# Altium PCB ALTERA256.PcbDoc (part 3 of 4)
Units mil, origin at the board's own origin, x right, y up, seen from the top; angles counter-clockwise.
Board outline 3078.86 x 1897.76 mil, 4 copper layers (TOP, L2_G, L3_P, BOTTOM), stack 34.7 mil thick; 112 components, 168 nets, 693 pads, 318 vias.
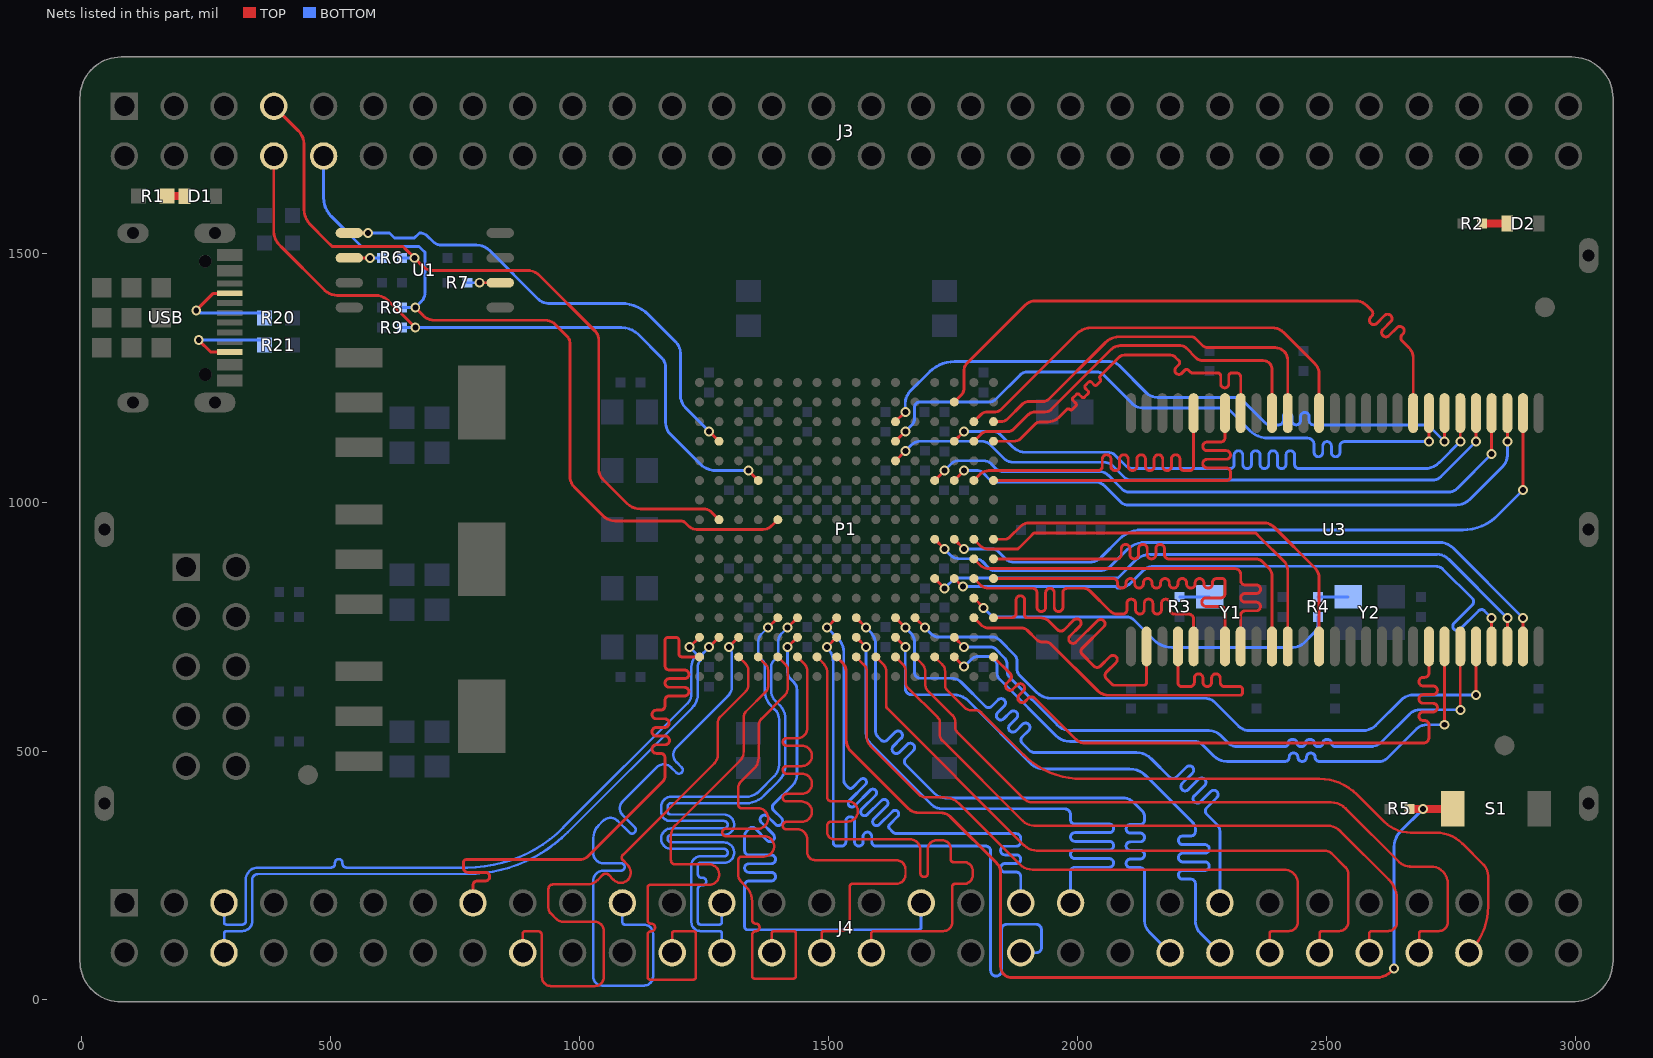
[diagram p5: the nets of this part, all layers, seen from the top]

## Via types
v1: diameter 20, hole 12, TOP to BOTTOM, 314 vias
v2: diameter 20, hole 12, TOP to BOTTOM, tented both sides, 4 vias

## Nets (pads, with @x,y where several pads share a name; then routed paths per layer and width w, separated by ;. In a path a pad name is that pad's centre, name@x,y a point inside that pad or via, vN(x,y) a via of type N, cw(c..) or ccw(c..) an arc to the next point about the centre after c; other vN are vias at no path point) (continued)
N5_B4P_B3: J4.26 P1.N5 | length 1376.5
  TOP w5.78: v1(1378.26,748.02) P1.N5@1397.94,767.7
  BOTTOM w5: J4.26@1285.73,94.88 1285.73,133.38 ccw(c1280.73,133.38) 1280.73,138.38 1242.49,138.38 cw(c1242.49,156.38) 1224.49,156.38 1224.49,270.5 cw(c1242.49,270.5) 1242.49,288.5 1289.8,288.5 ccw(c1289.8,296) 1289.8,303.5 1183.99,303.5 cw(c1183.99,324) 1183.99,344.5 1289.8,344.5 ccw(c1289.8,352) 1289.8,359.5 1181.99,359.5 cw(c1181.99,378) 1163.49,378 1163.49,388 cw(c1183.49,388) 1183.49,408 1333.76,408 ccw(c1333.77,445.53) 1360.3,418.99 1390.8,449.49 ccw(c1367.86,472.43) 1400.3,472.43 1400.3,563.49 ccw(c1372.46,563.48) 1392.56,582.74 1383.74,591.56 cw(c1412.59,620.4) 1371.8,620.41 1371.8,670.84 ccw(c1358.14,670.84) 1367.8,680.5 1361.8,686.5 cw(c1370.25,694.95) 1358.3,694.95 1358.3,719 cw(c1380.17,718.99) 1364.71,734.46 v1(1378.26,748.02)
N6_B4N_B3: J4.25 P1.N6 | length 1376.5
  TOP w5.78: v1(1417.63,748.02) P1.N6@1437.31,767.7
  BOTTOM w5: J4.25@1285.73,194.88 1285.73,156.38 cw(c1280.73,156.38) 1280.73,151.38 1242.49,151.38 cw(c1242.49,156.38) 1237.49,156.38 1237.49,222.9 cw(c1244.99,222.9) 1244.99,230.4 1246.8,230.4 ccw(c1246.8,237.9) 1246.8,245.4 1244.99,245.4 cw(c1244.99,252.9) 1237.49,252.9 1237.49,270.5 cw(c1242.49,270.5) 1242.49,275.5 1289.8,275.5 ccw(c1289.8,296) 1289.8,316.5 1183.99,316.5 cw(c1183.99,324) 1183.99,331.5 1289.8,331.5 ccw(c1289.8,352) 1289.8,372.5 1181.99,372.5 cw(c1181.99,378) 1176.49,378 1176.49,388 cw(c1183.49,388) 1183.49,395 1333.77,395 ccw(c1333.77,445.53) 1369.5,409.8 1399.99,440.29 ccw(c1367.86,472.42) 1413.3,472.44 1413.3,563.49 ccw(c1372.45,563.49) 1401.85,591.85 1392.94,600.76 cw(c1412.59,620.41) 1384.8,620.41 1384.8,670.84 cw(c1398.46,670.84) 1388.8,680.5 1394.8,686.5 ccw(c1386.35,694.95) 1398.3,694.95 1398.3,719 cw(c1421.69,719) 1405.15,735.54 v1(1417.63,748.02)
N8_IO_B3: J4.37 P1.N8 | length 1372.6
  TOP w5.78: v1(1496.37,748.02) P1.N8@1516.05,767.7
  BOTTOM w5.78: v1(1496.37,748.02) 1519.34,725.05 cw(c1492.88,698.59) 1530.3,698.59 1530.3,441.66 ccw(c1543.96,441.66) 1534.3,432 1539.99,426.31 ccw(c1543.8,430.12) 1547.61,426.31 1563.91,442.6 cw(c1568.91,437.6) 1573.91,432.6 1541.42,400.14 ccw(c1546.67,394.88) 1551.92,389.63 1583.6,421.3 cw(c1588.85,416.05) 1594.1,410.8 1566.56,383.27 ccw(c1572.06,377.77) 1577.56,372.27 1605.81,400.51 cw(c1611.31,395.01) 1616.81,389.51 1590.62,363.35 ccw(c1596.12,357.84) 1601.62,352.33 1628.05,378.75 cw(c1633.3,373.5) 1638.55,368.25 1622.12,351.82 ccw(c1625.94,348) 1622.12,344.18 1628.8,337.5 ccw(c1637.25,345.95) 1637.25,334 1876.51,334 cw(c1876.51,324.78) 1885.73,324.78 1885.73,317.44 cw(c1877.06,317.44) 1877.06,308.77 1853.97,308.77 ccw(c1853.97,300.1) 1853.97,291.43 1877.06,291.43 cw(c1877.06,282.76) 1877.06,274.09 1853.97,274.09 ccw(c1853.97,265.42) 1853.97,256.75 1877.06,256.75 cw(c1877.06,248.08) 1885.73,248.08 J4.37@1885.73,194.88
N9_IO_B4: J4.44 P1.N9 | length 1456.7
  TOP w5.78: P1.N9@1555.43,767.7 v1(1575.11,748.02)
  BOTTOM w5.78: v1(1575.11,748.02) 1583.16,739.97 cw(c1556.02,712.82) 1586.77,735.8 cw(c1556.44,713.14) 1594.3,713.15 1594.3,538.66 ccw(c1607.96,538.66) 1598.3,529 1605.3,522 ccw(c1611.43,528.13) 1617.56,522 1633.3,537.74 cw(c1639.44,531.61) 1645.57,525.47 1629.83,509.73 ccw(c1635.97,503.6) 1642.1,497.46 1657.84,513.2 cw(c1663.98,507.07) 1670.11,500.93 1654.37,485.19 ccw(c1660.5,479.06) 1654.37,472.93 1712.8,414.5 ccw(c1733.32,435.02) 1733.32,406 2089.3,406 cw(c2089.3,372.2) 2113.2,396.1 2129.35,379.95 cw(c2117.4,368) 2134.3,368 2134.3,361.1 cw(c2125.63,361.1) 2125.63,352.43 2105.97,352.43 ccw(c2105.97,343.76) 2105.97,335.09 2125.63,335.09 cw(c2125.63,326.42) 2125.63,317.75 2105.97,317.75 ccw(c2105.97,309.08) 2105.97,300.41 2125.63,300.41 cw(c2125.63,291.74) 2125.63,283.07 2105.97,283.07 ccw(c2105.97,274.4) 2105.97,265.73 2125.63,265.73 cw(c2125.63,257.06) 2134.3,257.06 2134.3,159.25 ccw(c2165.54,159.25) 2143.45,137.16 J4.44@2185.73,94.88
N11_IO_B4: J4.45 P1.N11 | length 1423.1
  TOP w5.78: P1.N11@1634.17,767.7 v1(1653.85,748.02)
  BOTTOM w5.78: v1(1653.85,748.02) 1664.73,737.14 cw(c1648.41,720.82) 1665.76,736.04 cw(c1645.94,718.66) 1672.3,718.65 1672.3,658 ccw(c1684.3,658) 1684.3,646 1746.99,646 cw(c1746.99,618.69) 1766.3,638 1814.85,589.45 ccw(c1820.98,595.58) 1827.11,589.45 1840.35,602.69 cw(c1846.48,596.55) 1852.62,590.42 1839.38,577.18 ccw(c1845.51,571.04) 1851.65,564.91 1864.89,578.15 cw(c1871.02,572.01) 1877.16,565.88 1863.92,552.64 ccw(c1870.06,546.51) 1876.19,540.37 1889.43,553.61 cw(c1895.57,547.48) 1901.7,541.34 1888.46,528.1 ccw(c1894.59,521.97) 1888.46,515.84 1903.3,501 ccw(c1912.96,510.66) 1912.96,497 2117.65,497 cw(c2117.65,454.36) 2147.8,484.51 2185.3,447.01 ccw(c2191.43,453.14) 2197.56,447.01 2218.29,467.73 cw(c2224.43,461.6) 2230.56,455.46 2209.83,434.74 ccw(c2215.97,428.61) 2222.1,422.47 2242.83,443.19 cw(c2248.97,437.06) 2255.1,430.92 2234.37,410.2 ccw(c2240.5,404.07) 2246.64,397.93 2267.37,418.65 cw(c2273.5,412.51) 2279.64,406.38 2258.91,385.66 ccw(c2265.04,379.53) 2258.91,373.4 2279.8,352.51 cw(c2265.48,338.19) 2285.73,338.19 J4.45@2285.73,194.88
NCONFIG: J3.10 P1.H5 R8.1 | length 1568.9
  TOP w5.78: v1(669.81,1390.39) 685.75,1374.45 ccw(c708.56,1397.26) 708.56,1365 930.99,1365 cw(c930.99,1337.69) 950.3,1357 975.3,1332 cw(c963.23,1319.93) 980.3,1319.93 980.3,1052.44 ccw(c1012.74,1052.44) 989.8,1029.5 1047.3,972 ccw(c1071.44,996.14) 1071.44,962 1204.06,962 cw(c1204.06,951.76) 1211.3,959 1218.3,952 ccw(c1235.2,968.9) 1235.2,945 1368.3,945 ccw(c1368.3,969.34) 1385.51,952.13 P1.H5@1397.94,964.56
  BOTTOM w5.78: J3.10@485.73,1694.88 485.73,1611.18 ccw(c538.63,1611.18) 501.22,1573.78 561.69,1513.31 677.52,1513.31 682.56,1508.26 689.3,1501.53 689.3,1492 689.3,1420.4 cw(c663.9,1420.4) 681.86,1402.44 v1(669.81,1390.39) R8.1@643,1390.39
NCSO: P1.D2 U1.1 | length 979.1
  TOP w5.78: U1.1@537.38,1540.39 537.57,1540.19 574.8,1540.19 v1(575,1540) ; v1(1260.15,1141.72) P1.D2@1279.83,1122.04
  BOTTOM w5.78: v1(575,1540) 618.31,1540 628.31,1530 667.77,1530 678.16,1540.39 cw(c678.16,1516.87) 694.79,1533.5 705.29,1523 ccw(c722.19,1539.9) 722.19,1516 792.74,1516 cw(c792.74,1478.44) 819.3,1505 917.3,1407 ccw(c936.61,1426.31) 936.61,1399 1082.77,1399 cw(c1082.77,1320.47) 1138.3,1376 1193.3,1321 cw(c1171.57,1299.27) 1202.3,1299.27 1202.3,1214.82 ccw(c1239.11,1214.82) 1213.08,1188.79 v1(1260.15,1141.72)
NDATA: J3.7 P1.H2 R6.1 | length 1513.6
  TOP w5.78: J3.7@385.73,1794.88 434.95,1745.66 435.47,1745.13 cw(c409.34,1718.99) 446.3,1719 446.3,1587.69 ccw(c488.98,1587.69) 458.8,1557.51 491.8,1524.51 503,1513.31 645.08,1513.31 651.84,1506.55 v1(668,1490.39) 685.84,1472.55 ccw(c704.07,1490.78) 704.07,1465 895.16,1465 cw(c895.16,1430.86) 919.3,1455 1031.3,1343 cw(c1014.4,1326.1) 1038.3,1326.1 1038.3,1065 ccw(c1064.86,1065) 1046.08,1046.22 1095.3,997 ccw(c1121.86,1023.56) 1121.86,986 1248.56,986 cw(c1248.56,962.27) 1265.34,979.05 P1.H2@1279.83,964.56
  BOTTOM w5.78: R6.1@643,1490.39 v1(668,1490.39)
NetD1_1: D1.1 R1.2 | length 44.1
  TOP w16: R1.2@162.55,1614.28 D1.1@206.63,1614.28
NetD2_1: D2.1 R2.1 | length 50.5
  TOP w16: R2.1@2812.42,1559.28 D2.1@2862.87,1559.28
NetR3_2: R3.2 Y1.3 | length 60
  BOTTOM w5.78: R3.2@2204.99,809.5 Y1.3@2264.99,809.5
NetR4_2: R4.2 Y2.3 | length 60
  BOTTOM w5.78: R4.2@2482.99,809.5 Y2.3@2542.99,809.5
NetR6_2: R6.2 U1.2 | length 65.6
  TOP w5.78: U1.2@537.38,1490.39 v1(578.94,1490.39)
  BOTTOM w5.78: v1(578.94,1490.39) R6.2@603,1490.39
NetR7_1: R7.1 U1.6 | length 65.6
  TOP w5.78: v1(798.96,1440.39) U1.6@840.52,1440.39
  BOTTOM w5.78: R7.1@774.95,1440.39 v1(798.96,1440.39)
NetR20_1: R20.1 USB.4 | length 228.2
  TOP w6: v2(230,1385) 264.21,1419.21 USB.4@296.95,1419.21
  BOTTOM w6: v2(230,1385) 233.79,1385 238.79,1380 R20.1@375,1380
NetR21_1: R21.1 USB.10 | length 211.8
  TOP w6: v2(235,1325) 258.9,1301.1 USB.10@296.95,1301.1
  BOTTOM w6: v2(235,1325) R21.1@375,1325
NSTATUS: J3.8 P1.F4 R9.1 | length 1435.6
  TOP w5.78: J3.8@385.73,1694.88 385.73,1544 ccw(c425.42,1543.99) 397.35,1515.93 401.79,1511.5 487.79,1425.5 ccw(c513.14,1450.85) 513.14,1415 589.57,1415 cw(c589.57,1377.27) 616.25,1403.95 v1(669.81,1350.39) ; v1(1338.89,1062.98) P1.F4@1358.57,1043.3
  BOTTOM w5.78: R9.1@643,1350.39 v1(669.81,1350.39) 1084.27,1350.39 cw(c1084.27,1302.97) 1117.8,1336.5 1164.8,1289.5 cw(c1146.69,1271.39) 1172.3,1271.39 1172.3,1160.85 ccw(c1208.15,1160.85) 1182.8,1135.5 1241.3,1077 ccw(c1275.15,1110.85) 1275.15,1062.98 v1(1338.89,1062.98)
P1_L15N_B2: J4.5 P1.P1 | length 1369.8
  TOP w5.78: v1(1220.78,708.65) P1.P1@1240.46,728.33
  BOTTOM w5: J4.5@285.73,194.88 285.73,156.38 ccw(c290.73,156.38) 290.73,151.38 322.3,151.38 ccw(c322.3,158.38) 329.3,158.38 329.3,241.05 cw(c354.25,241.05) 354.25,266 501.11,266 ccw(c501.11,273.5) 508.61,273.5 508.61,275.5 cw(c516.11,275.5) 523.61,275.5 523.61,273.5 ccw(c531.11,273.5) 531.11,266 773.77,266 ccw(c773.77,539.12) 966.9,346 1216.8,595.9 ccw(c1198.71,614) 1224.3,614 1224.3,669.21 cw(c1256.09,669.23) 1233.6,691.7 1233.73,691.83 1233.96,692.05 1233.96,693.4 ccw(c1228.96,693.4) 1232.5,696.93 v1(1220.78,708.65)
P2_L15P_B2: J4.6 P1.P2 | length 1369.7
  TOP w5.78: v1(1260.15,708.65) P1.P2@1279.83,728.33
  BOTTOM w5: J4.6@285.73,94.88 285.73,133.38 cw(c290.73,133.38) 290.73,138.38 322.3,138.38 ccw(c322.3,158.38) 342.3,158.38 342.3,241.05 cw(c354.25,241.05) 354.25,253 773.77,253 ccw(c773.78,539.13) 976.1,336.8 1226,586.7 ccw(c1198.7,613.99) 1237.3,614.01 1237.3,669.22 cw(c1256.08,669.22) 1242.8,682.5 1246.96,686.66 1246.96,693.39 cw(c1251.96,693.39) 1248.42,696.92 v1(1260.15,708.65)
P3_B1N_B3: J4.21 P1.P3 | length 1405.8
  TOP w5.78: v1(1299.52,708.65) P1.P3@1319.2,728.33
  BOTTOM w5: J4.21@1085.73,194.88 1085.73,156.38 ccw(c1090.73,156.38) 1090.73,151.38 1129.3,151.38 cw(c1129.3,133.38) 1147.3,133.38 1147.3,47 cw(c1129.3,47) 1129.3,29 1045.3,29 cw(c1045.3,47) 1027.3,47 1027.3,239.17 cw(c1047.8,239.17) 1047.8,259.67 1082.91,259.67 ccw(c1082.91,267.17) 1082.91,274.67 1047.8,274.67 cw(c1047.8,295.17) 1027.3,295.17 1027.3,324.44 cw(c1064.85,324.44) 1038.29,350.99 1047.2,359.9 cw(c1061.7,345.39) 1076.19,359.9 1099.68,336.39 ccw(c1104.98,341.69) 1110.28,336.4 ; 1110.31,336.43 ccw(c1105.01,341.73) 1110.31,347.02 1086.81,370.53 cw(c1101.32,385.02) 1086.81,399.51 1154.46,467.16 cw(c1168.95,452.65) 1183.45,467.15 1193.94,456.66 ccw(c1199.24,461.95) 1204.54,456.66 ; 1204.57,456.69 ccw(c1199.27,461.99) 1204.57,467.28 ; 1204.57,467.29 1194.07,477.79 cw(c1208.58,492.28) 1194.07,506.77 1297.8,610.5 ccw(c1279.69,628.61) 1305.3,628.61 1305.3,694.7 ccw(c1285.57,694.7) v1@1299.52,708.65
P6_IO_VREF_B3: J4.33 P1.P6 | length 1415.6
  TOP w5.78: v1(1417.63,708.65) P1.P6@1437.31,728.33
  BOTTOM w5.78: 1377.19,368.63 1392.93,352.89 ccw(c1399.07,359.02) 1405.2,365.16 1389.46,380.9 cw(c1395.59,387.03) 1389.46,393.16 1427.3,431 ccw(c1405.57,452.73) 1436.3,452.73 1436.3,622.81 ccw(c1414.11,622.81) 1429.8,638.5 1422.8,645.5 cw(c1435.28,657.98) 1417.63,657.98 v1(1417.63,708.65) ; 1377.2,368.64 ccw(c1371.06,362.5) 1364.92,356.36 1388.54,332.74 ; 1388.55,332.75 cw(c1382.41,326.61) 1376.27,320.47 1352.65,344.09 ccw(c1346.52,337.96) 1340.39,344.09 1335.8,339.5 ccw(c1346.66,328.64) 1331.3,328.64 1331.3,299.68 ccw(c1339.97,299.68) 1339.97,291.01 1384.63,291.01 cw(c1384.63,282.34) 1384.63,273.67 1339.97,273.67 ccw(c1339.97,265) 1339.97,256.33 1384.63,256.33 cw(c1384.63,247.66) 1384.63,238.99 1339.97,238.99 ccw(c1339.97,230.32) 1331.3,230.32 1331.3,146.78 ccw(c1337.08,146.78) 1337.08,141 1679.95,141 ccw(c1679.95,146.78) 1685.73,146.78 J4.33@1685.73,194.88
P8_IO_B3: J4.38 P1.P8 | length 1427
  TOP w5.78: v1(1496.37,708.65) P1.P8@1516.05,728.33
  BOTTOM w5.78: v1(1496.37,708.65) cw(c1465.15,677.43) 1509.3,677.43 1509.3,315.82 ccw(c1516.12,315.82) 1516.12,309 1525.86,309 ccw(c1525.86,317.67) 1534.53,317.67 1534.53,359.38 cw(c1543.2,359.38) 1551.87,359.38 1551.87,317.67 ccw(c1560.54,317.67) 1569.21,317.67 1569.21,328.33 cw(c1577.88,328.33) 1586.55,328.33 1586.55,317.67 ccw(c1595.22,317.67) 1595.22,309 1815.3,309 cw(c1815.3,299) 1825.3,299 1825.3,58.97 ccw(c1836.3,58.97) 1847.3,58.97 1847.3,142 cw(c1857.3,142) 1857.3,152 1916.3,152 cw(c1916.3,141) 1927.3,141 1927.3,105 cw(c1917.18,105) 1917.18,94.88 J4.38@1885.73,94.88
P9_IO_B4: J4.39 P1.P9 | length 1337.4
  TOP w5.78: P1.P9@1555.43,728.33 v1(1575.11,708.65)
  BOTTOM w5.78: v1(1575.11,708.65) 1575.11,534.36 ccw(c1599.66,534.36) 1582.3,517 1706.8,392.5 ccw(c1727.32,413.02) 1727.32,384 1973.73,384 cw(c1973.73,372) 1985.73,372 1985.73,361.99 ccw(c1994.4,361.99) 1994.4,353.32 2063.63,353.32 cw(c2063.63,344.65) 2063.63,335.98 1994.4,335.98 ccw(c1994.4,327.31) 1994.4,318.64 2063.63,318.64 cw(c2063.63,309.97) 2063.63,301.3 1994.4,301.3 ccw(c1994.4,292.63) 1994.4,283.96 2063.63,283.96 cw(c2063.63,275.29) 2063.63,266.62 1994.4,266.62 ccw(c1994.4,257.95) 1985.73,257.95 J4.39@1985.73,194.88
P11_IO_VREF_B4: J4.46 P1.P11 | length 1349.2
  TOP w5.78: P1.P11@1634.17,728.33 v1(1653.85,708.65)
  BOTTOM w5.78: v1(1653.85,708.65) 1653.85,626 ccw(c1666.85,626) 1666.85,613 1750.62,613 cw(c1750.62,570.32) 1780.8,600.5 1907.8,473.5 ccw(c1930.74,496.44) 1930.74,464 2104.21,464 cw(c2104.21,417.91) 2136.8,450.5 2231.35,355.95 cw(c2219.4,344) 2236.3,344 2236.3,338.04 cw(c2227.63,338.04) 2227.63,329.37 2210.97,329.37 ccw(c2210.97,320.7) 2210.97,312.03 2255.63,312.03 cw(c2255.63,303.36) 2255.63,294.69 2210.97,294.69 ccw(c2210.97,286.02) 2210.97,277.35 2255.63,277.35 cw(c2255.63,268.68) 2255.63,260.01 2210.97,260.01 ccw(c2210.97,251.34) 2210.97,242.67 2227.63,242.67 cw(c2227.63,234) 2236.3,234 2236.3,160.08 ccw(c2274.37,160.08) 2247.45,133.16 J4.46@2285.73,94.88
R1_IO_B2: J4.15 P1.R1 | length 1319
  TOP w5.78: J4.15@785.73,194.88 785.73,230.32 cw(c794.4,230.32) 794.4,238.99 810.63,238.99 ccw(c810.63,247.66) 810.63,256.33 775.4,256.33 cw(c775.4,265) 766.73,265 766.73,276.22 cw(c772.51,276.22) 772.51,282 999.69,282 ccw(c999.69,307.61) 1017.8,289.5 1166.8,438.5 ccw(c1155.94,449.36) 1171.3,449.36 1171.3,486.66 ccw(c1162.63,486.66) 1162.63,495.33 1153.97,495.33 cw(c1153.97,504) 1153.97,512.67 1171.64,512.67 ccw(c1171.64,521.34) 1171.64,530.01 1153.97,530.01 cw(c1153.97,538.68) 1153.97,547.35 1170.83,547.35 ccw(c1170.83,556.02) 1170.83,564.69 1153.97,564.69 cw(c1153.97,573.36) 1153.97,582.03 1162.63,582.03 ccw(c1162.63,590.7) 1171.3,590.7 1171.3,601.95 cw(c1179.97,601.95) 1179.97,610.62 1210.63,610.62 ccw(c1210.63,619.29) 1210.63,627.96 1179.97,627.96 cw(c1179.97,636.63) 1179.97,645.3 1210.63,645.3 ccw(c1210.63,653.97) 1210.63,662.64 1179.97,662.64 cw(c1179.97,671.31) 1171.3,671.31 1171.3,722.22 cw(c1177.08,722.22) 1177.08,728 1193.3,728 cw(c1193.3,722) 1199.3,722 1199.3,694.96 ccw(c1205.3,694.96) 1205.3,688.96 P1.R1@1240.46,688.96
R3_B2P_B3: J4.18 P1.R3 | length 1324.7
  TOP w5: J4.18@885.73,94.88 885.73,133.38 cw(c890.73,133.38) 890.73,138.38 915.3,138.38 cw(c915.3,129.38) 924.3,129.38 924.3,46 ccw(c942.3,46) 942.3,28 1030.3,28 ccw(c1030.3,46) 1048.3,46 1048.3,139 ccw(c1030.3,139) 1030.3,157 967.46,157 cw(c967.46,178.17) 952.49,163.2 941.99,173.7 cw(c953.31,185.02) 937.3,185.02 937.3,223 cw(c946.3,223) 946.3,232 1015.27,232 ccw(c1015.27,261.02) 1035.79,240.5 1046.99,251.7 cw(c1052.29,246.39) 1057.59,251.7 1068.3,240.99 ccw(c1082.43,255.12) 1096.55,240.99 ccw(c1081.67,255.88) 1096.55,270.76 1086.61,280.72 cw(c1091.92,286.02) 1086.61,291.32 1270.29,475 ccw(c1253.37,491.92) 1277.3,491.92 1277.3,556.27 cw(c1295.02,556.27) 1282.49,568.8 1333.49,619.8 ccw(c1321.88,631.41) 1338.3,631.41 1338.3,663.4 ccw(c1322.7,663.4) 1333.73,674.43 P1.R3@1319.2,688.96
R4_PLL1_CLKOUTP_B3: J4.24 P1.R4 | length 1244
  TOP w5: J4.24@1185.73,94.88 1185.73,133.38 cw(c1190.73,133.38) 1190.73,138.38 1228.3,138.38 cw(c1228.3,133.38) 1233.3,133.38 1233.3,46 cw(c1228.3,46) 1228.3,41 1141.3,41 cw(c1141.3,46) 1136.3,46 1136.3,130.63 cw(c1143.8,130.63) 1143.8,138.13 ccw(c1143.8,145.63) 1143.8,153.13 cw(c1143.8,160.63) 1136.3,160.63 1136.3,225.43 cw(c1142.3,225.43) 1142.3,231.43 1259.8,231.43 ccw(c1259.8,251.93) 1259.8,272.43 1191.3,272.43 cw(c1191.3,280.43) 1183.3,280.43 1183.3,329.9 cw(c1212.55,329.9) 1191.88,350.59 1321.79,480.5 ccw(c1303.66,498.63) 1329.3,498.63 1329.3,568.68 cw(c1343.61,568.68) 1333.49,578.8 1374.49,619.8 ccw(c1365.29,629) 1378.3,629 1378.3,662.31 ccw(c1361.6,662.31) 1373.41,674.12 P1.R4@1358.57,688.96
R5_B6P_B3: J4.28 P1.R5 | length 1264.4
  TOP w5: J4.28@1385.73,94.88 1385.73,133.38 cw(c1390.73,133.38) 1390.73,138.38 1429.3,138.38 cw(c1429.3,133.38) 1434.3,133.38 1434.3,48 cw(c1429.3,48) 1429.3,43 1351.3,43 cw(c1351.3,48) 1346.3,48 1346.3,130.74 cw(c1353.8,130.74) 1353.8,138.24 ccw(c1353.8,145.74) 1353.8,153.24 cw(c1353.8,160.74) 1346.3,160.74 1346.3,197 ccw(c1301.91,197.01) 1333.31,228.39 1324,237.7 cw(c1337.77,251.45) 1318.31,251.45 1318.3,280.55 cw(c1325.8,280.55) 1325.8,288.05 1369.91,288.05 ccw(c1369.91,308.55) 1369.91,329.05 1293.7,329.05 cw(c1293.7,336.55) 1293.7,344.05 1357.8,344.05 ccw(c1357.8,364.55) 1357.8,385.05 1325.8,385.05 cw(c1325.8,392.55) 1318.3,392.55 1318.3,426.51 cw(c1334.02,426.5) 1322.92,437.63 1350.79,465.5 ccw(c1330.25,486.04) 1359.3,486.04 1359.3,551.25 cw(c1378.04,551.25) 1364.79,564.5 1410.52,610.24 ccw(c1391.77,629.01) 1418.3,628.99 1418.3,661.25 ccw(c1400.55,661.25) 1413.1,673.8 P1.R5@1397.94,688.96
R6_B7P_B3: J4.30 P1.R6 | length 1286.5
  TOP w5: P1.R6@1437.31,688.96 1451.28,674.99 cw(c1436.75,660.46) 1457.3,660.46 1457.3,546.19 cw(c1436.8,546.19) 1436.8,525.69 1415.26,525.69 ccw(c1415.26,518.19) 1415.26,510.69 1445.8,510.69 cw(c1445.8,490.19) 1445.8,469.69 1415.26,469.69 ccw(c1415.26,462.19) 1415.26,454.69 1445.8,454.69 cw(c1445.8,434.19) 1445.8,413.69 1415.26,413.69 ccw(c1415.26,406.19) 1415.26,398.69 1445.8,398.69 cw(c1445.8,378.19) 1445.8,357.69 1415.26,357.69 ccw(c1415.26,350.19) 1415.26,342.69 1436.8,342.69 cw(c1436.8,322.19) 1457.3,322.19 1457.3,296 ccw(c1472.3,296) 1472.3,281 1635.3,281 cw(c1635.3,262) 1654.3,262 1654.3,252 cw(c1635.3,252) 1635.3,233 1547.3,233 ccw(c1547.3,228) 1542.3,228 1542.3,156.38 cw(c1524.3,156.38) 1524.3,138.38 1490.73,138.38 ccw(c1490.73,133.38) 1485.73,133.38 J4.30@1485.73,94.88
R7_B8P_B3: J4.32 P1.R7 | length 1277
  TOP w5: P1.R7@1476.68,688.96 1488.47,677.17 cw(c1467.15,655.85) 1497.3,655.85 1497.3,406.75 ccw(c1504.8,406.75) 1504.8,399.25 1538.1,399.25 cw(c1538.1,378.75) 1538.1,358.25 1504.8,358.25 ccw(c1504.8,350.75) 1497.3,350.75 1497.3,335.92 ccw(c1510.22,335.92) 1510.22,323 1662.44,323 cw(c1662.44,301.33) 1684.11,301.33 1684.11,254.5 ccw(c1691.61,254.5) 1699.11,254.5 1699.11,302.81 cw(c1717.3,302.81) 1717.3,321 1727.3,321 cw(c1727.3,303) 1745.3,303 1745.3,282 ccw(c1750.3,282) 1750.3,277 1771.3,277 cw(c1771.3,259) 1789.3,259 1789.3,251 cw(c1771.3,251) 1771.3,233 1753.3,233 ccw(c1753.3,228) 1748.3,228 1748.3,156.38 cw(c1730.3,156.38) 1730.3,138.38 1590.73,138.38 ccw(c1590.73,133.38) 1585.73,133.38 J4.32@1585.73,94.88
R8_KEY_B3: P1.R8 R5.2 S1.1 | length 2031
  TOP w5.78: P1.R8@1516.05,688.96 1528.15,676.86 cw(c1510.89,659.6) 1535.3,659.6 1535.3,522.44 ccw(c1567.74,522.44) 1544.8,499.5 1659.8,384.5 ccw(c1680.32,405.02) 1680.32,376 1724.78,376 cw(c1724.78,348.48) 1744.24,367.94 1837.74,274.44 cw(c1819.49,256.19) 1845.3,256.19 1845.3,67 ccw(c1867.3,67) 1867.3,45 2600.3,45 ccw(c2600.3,86.04) 2629.32,57.02 v1(2635.3,63)
  TOP w16: R5.2@2666.28,383.99 v1(2693.87,383.99) S1.1@2753.67,383.99
  BOTTOM w5.78: v1(2635.3,63) 2635.3,306.63 cw(c2680.67,306.63) 2648.59,338.71 v1(2693.87,383.99)
R9_B12P_CLK7P_B4: J4.48 P1.R9 | length 1347.1
  TOP w5: P1.R9@1555.43,688.96 1570.34,674.05 cw(c1555.95,659.66) 1576.3,659.66 1576.3,529 ccw(c1602.86,529) 1584.08,510.22 1682.3,412 ccw(c1694.37,424.07) 1694.37,407 1731.92,407 cw(c1731.92,365.07) 1761.57,394.72 1883.49,272.8 ccw(c1909.57,298.88) 1909.56,262 2413.94,262 cw(c2413.94,233.64) 2442.3,233.64 2442.3,156.38 cw(c2424.3,156.38) 2424.3,138.38 2390.73,138.38 ccw(c2390.73,133.38) 2385.73,133.38 J4.48@2385.73,94.88
R10_B16P_B4: J4.50 P1.R10 | length 1382.6
  TOP w5: P1.R10@1594.8,688.96 1610.03,673.73 cw(c1596.41,660.11) 1615.67,660.11 1615.67,589.72 ccw(c1620.72,589.72) 1617.13,586.17 1892.68,310.62 ccw(c1918.32,336.26) 1918.32,300 2496.84,300 cw(c2496.85,281.99) 2509.58,294.73 2538.03,266.26 cw(c2525.29,253.53) 2543.3,253.53 2543.3,156.38 cw(c2525.3,156.38) 2525.3,138.38 2490.73,138.38 ccw(c2490.73,133.38) 2485.73,133.38 J4.50@2485.73,94.88
R11_B17P_B4: J4.52 P1.R11 | length 1410.5
  TOP w5: P1.R11@1634.17,688.96 1648.21,674.92 cw(c1631.72,658.43) 1655.04,658.43 1655.04,635.56 ccw(c1665.86,635.56) 1658.21,627.91 1719.21,566.91 cw(c1709.34,557.04) 1723.3,557.04 1723.3,533.07 ccw(c1740.37,533.07) 1728.3,521 1889.8,359.5 ccw(c1912.74,382.45) 1912.74,350 2502.2,350 cw(c2502.2,314.99) 2526.95,339.75 2624.77,241.93 cw(c2584.84,202.01) 2641.3,202 2641.3,156.38 cw(c2623.3,156.38) 2623.3,138.38 2590.73,138.38 ccw(c2590.73,133.38) 2585.73,133.38 J4.52@2585.73,94.88
R12_B18P_B4: J4.54 P1.R12 | length 1482.5
  TOP w5: P1.R12@1673.54,688.96 1686.9,675.6 cw(c1668.77,657.47) 1694.41,657.47 1694.41,630.68 ccw(c1705.98,630.68) 1697.8,622.5 1748.8,571.5 cw(c1735.52,558.22) 1754.3,558.22 1754.3,545.54 ccw(c1762.84,545.54) 1756.8,539.5 1893.45,402.85 ccw(c1907.58,416.99) 1907.58,397 2508.41,397 cw(c2508.41,355.26) 2537.93,384.77 2645.88,276.82 ccw(c2667.16,298.09) 2667.14,268 2667.15,268.09 ccw(c2669.4,296) 2669.29,268 2709.26,268 cw(c2709.26,233.96) 2743.3,233.96 2743.3,156.38 cw(c2725.3,156.38) 2725.3,138.38 2690.73,138.38 ccw(c2690.73,133.38) 2685.73,133.38 J4.54@2685.73,94.88
R13_B20P_B4: J4.56 P1.R13 | length 1468.1
  TOP w5: P1.R13@1712.91,688.96 1728.08,673.79 cw(c1714.32,660.03) 1733.78,660.03 1733.78,632.21 ccw(c1747.51,632.14) 1733.87,630.57 ccw(c1747.5,632.22) 1737.8,622.5 1773.8,586.5 ccw(c1784.67,597.35) 1782.85,582.1 ccw(c1784.6,597.36) 1784.66,582 1795.62,582 cw(c1795.62,567.32) 1806,577.7 1891.14,492.56 ccw(c2008.39,609.83) 2008.4,444 2485.62,444 cw(c2485.62,337.6) 2560.85,412.84 2615.34,358.35 ccw(c2669.3,412.31) 2669.3,336 2719.84,336 cw(c2719.86,261.53) 2772.5,314.2 2815.55,271.15 cw(c2794.4,250.01) 2824.3,250 2824.3,187.98 cw(c2692.65,187.98) J4.56@2785.73,94.88
RFU_CLK: P1.M15 R4.1 | length 765.1
  TOP w5.78: P1.M15@1791.65,807.07 v1(1811.33,787.39)
  BOTTOM w5.78: v1(1811.33,787.39) 1822.24,776.48 ccw(c1840.3,794.54) 1840.3,769 2098.81,769 cw(c2098.81,748.51) 2113.3,763 2153.45,722.85 ccw(c2189.3,758.7) 2189.3,708 2432.57,708 ccw(c2432.57,738.73) 2454.3,717 2474.8,737.5 ccw(c2455.03,757.27) 2482.99,757.27 R4.1@2482.99,769.5
SDRAM_A0: P1.N12 U3.23 | length 1354.6
  TOP w5.78: P1.N12@1673.54,767.7 v1(1693.22,748.02) ; v1(2799.88,612.73) U3.23@2799.88,710.04
  BOTTOM w5.78: v1(1693.22,748.02) 1706.77,734.47 ccw(c1719.98,747.68) 1719.98,729 1828.11,729 cw(c1828.11,706.81) 1843.8,722.5 1873.3,693 cw(c1861.23,680.93) 1878.3,680.93 1878.3,664.78 ccw(c1897.08,664.78) 1883.8,651.5 1917.3,618 ccw(c1946.27,646.97) 1946.27,606 2255.28,606 cw(c2255.28,576.98) 2275.8,597.5 2323.3,550 ccw(c2345.03,571.73) 2345.03,541 2572.73,541 ccw(c2572.73,578.56) 2599.29,552 2649.29,602 cw(c2675.19,576.1) 2675.19,612.73 v1(2799.88,612.73)
SDRAM_A1: P1.L14 U3.24 | length 1326.2
  TOP w5.78: P1.L14@1752.28,846.44 1752.92,846.44 1769.36,830 v1(1770,830) ; U3.24@2831.38,710.04 v1(2831.38,767.35)
  BOTTOM w5.78: v1(1770,830) 2076.92,830 2080.16,826.76 ccw(c2080.16,865.14) 2107.3,838 2130.8,861.5 cw(c2153.74,838.56) 2153.74,871 2718.85,871 cw(c2718.85,849.56) 2734.01,864.72 2792.78,805.95 cw(c2786.65,799.82) 2792.78,793.69 2755.82,756.74 ccw(c2761.96,750.61) 2768.09,744.47 2805.05,781.42 cw(c2811.18,775.29) 2817.31,781.42 v1(2831.38,767.35)
SDRAM_A2: P1.L13 U3.25 | length 1293.2
  TOP w5.78: P1.L13@1712.91,846.44 v1(1732.59,826.76) ; U3.25@2862.88,710.04 v1(2862.88,767.35)
  BOTTOM w5.78: v1(1732.59,826.76) 1753.52,847.69 2080.99,847.69 2115.3,882 cw(c2146.68,850.62) 2146.68,895 2721.3,895 cw(c2721.3,861.37) 2745.08,885.15 v1(2862.88,767.35)
SDRAM_A3: P1.J13 U3.26 | length 1343.4
  TOP w5.78: P1.J13@1712.91,925.18 v1(1732.59,905.5) ; U3.26@2894.37,710.04 v1(2894.37,767.35)
  BOTTOM w5.78: v1(1732.59,905.5) 1744.87,893.22 ccw(c1762.3,910.65) 1762.3,886 1796.23,886 cw(c1796.23,868.93) 1808.3,881 1822.3,867 ccw(c1834.37,879.07) 1834.37,862 2043.16,862 ccw(c2043.16,896.14) 2067.3,872 2099.3,904 cw(c2135.51,867.79) 2135.51,919 2726.05,919 cw(c2726.05,878.75) 2754.51,907.21 v1(2894.37,767.35)
SDRAM_A4: P1.J14 U3.29 | length 1365.6
  TOP w5.78: P1.J14@1752.28,925.18 v1(1771.96,905.5) ; v1(2894.37,1024.23) U3.29@2894.37,1178.54
  BOTTOM w5.78: v1(1771.96,905.5) 1829.44,905.5 cw(c1829.44,890.14) 1840.3,901 1855.3,886 ccw(c1872.2,902.9) 1872.2,879 2022.86,879 ccw(c2022.86,913.86) 2047.51,889.21 2083.98,925.68 cw(c2128.2,881.47) 2128.2,944 2773.43,944 ccw(c2773.43,1042.29) 2842.93,972.79 v1(2894.37,1024.23)
SDRAM_A5: P1.F14 U3.30 | length 1274.9
  TOP w5.78: P1.F14@1752.28,1043.3 v1(1771.96,1062.98) ; v1(2862.88,1121.23) U3.30@2862.88,1178.54
  BOTTOM w5.78: v1(1771.96,1062.98) 1799.69,1062.98 cw(c1799.69,1049.39) 1809.3,1059 1823.8,1044.5 ccw(c1834.66,1055.36) 1834.66,1040 2036.4,1040 cw(c2036.4,1016.1) 2053.3,1033 2085.8,1000.5 ccw(c2101.49,1016.19) 2101.49,994 2760.56,994 ccw(c2760.56,1032) 2787.43,1005.13 2853.8,1071.5 ccw(c2831.88,1093.42) 2862.88,1093.42 v1(2862.88,1121.23)
SDRAM_A6: P1.F13 U3.31 | length 1269.4
  TOP w5.78: P1.F13@1712.91,1043.3 v1(1732.59,1062.98) ; v1(2831.38,1096.23) U3.31@2831.38,1178.54
  BOTTOM w5.78: v1(1732.59,1062.98) 1746.95,1077.34 cw(c1760.61,1063.68) 1760.61,1083 1811.28,1083 cw(c1811.28,1061.22) 1826.68,1076.62 1836.3,1067 ccw(c1850.78,1081.47) 1850.78,1061 2044.4,1061 cw(c2044.4,1037.1) 2061.3,1054 2090.38,1024.92 ccw(c2102.25,1036.78) 2102.25,1020 2744.26,1020 ccw(c2744.26,1046.29) 2762.85,1027.7 v1(2831.38,1096.23)
SDRAM_A7: P1.E11 U3.32 | length 1297.6
  TOP w5.78: P1.E11@1634.17,1082.67 v1(1653.85,1102.35) ; v1(2799.88,1121.23) U3.32@2799.88,1178.54
  BOTTOM w5.78: v1(1653.85,1102.35) 1666.4,1114.9 cw(c1683.54,1097.76) 1683.54,1122 1808.11,1122 cw(c1808.11,1099.81) 1823.8,1115.5 1851.8,1087.5 ccw(c1869.91,1105.61) 1869.91,1080 2052.69,1080 cw(c2052.69,1054.39) 2070.8,1072.5 2093.95,1049.35 ccw(c2106.86,1062.25) 2106.86,1044 2712.7,1044 ccw(c2712.7,1068.02) 2729.69,1051.04 v1(2799.88,1121.23)
SDRAM_A8: P1.D14 U3.33 | length 1357.2
  TOP w5.78: P1.D14@1752.28,1122.04 v1(1771.96,1141.72) ; v1(2768.39,1121.23) U3.33@2768.39,1178.54
  BOTTOM w5.78: v1(1771.96,1141.72) 1829.08,1141.72 cw(c1829.08,1118.78) 1845.3,1135 1869.8,1110.5 ccw(c1895.15,1135.85) 1895.15,1100 2060.81,1100 cw(c2060.81,1079.51) 2075.3,1094 2095.8,1073.5 ccw(c2111.49,1089.19) 2111.49,1067 2305.65,1067 ccw(c2305.65,1075.67) 2314.32,1075.67 2314.32,1094.33 cw(c2322.99,1094.33) 2331.66,1094.33 2331.66,1075.67 ccw(c2340.33,1075.67) 2349,1075.67 2349,1094.33 cw(c2357.67,1094.33) 2366.34,1094.33 2366.34,1075.67 ccw(c2375.01,1075.67) 2383.68,1075.67 2383.68,1094.33 cw(c2392.35,1094.33) 2401.02,1094.33 2401.02,1075.67 ccw(c2409.69,1075.67) 2418.36,1075.67 2418.36,1094.33 cw(c2427.03,1094.33) 2435.7,1094.33 2435.7,1075.67 ccw(c2444.37,1075.67) 2444.37,1067 2696.38,1067 ccw(c2696.38,1109.92) 2726.73,1079.57 v1(2768.39,1121.23)
SDRAM_A9: P1.C11 U3.34 | length 1355.2
  TOP w5.78: P1.C11@1634.17,1161.41 v1(1653.85,1181.09) ; v1(2736.89,1121.23) U3.34@2736.89,1178.54
  BOTTOM w5.78: v1(1653.85,1181.09) 1653.85,1198.22 cw(c1688.45,1198.22) 1663.98,1222.68 1702.66,1261.37 cw(c1752.46,1211.58) 1752.46,1282 2064.69,1282 cw(c2064.69,1256.39) 2082.8,1274.5 2137.8,1219.5 ccw(c2160.74,1242.44) 2160.74,1210 2316.11,1210 cw(c2316.11,1187.81) 2331.8,1203.5 2374.8,1160.5 ccw(c2388.08,1173.78) 2388.08,1155 2404.23,1155 ccw(c2404.23,1163.67) 2412.9,1163.67 2412.9,1171.33 cw(c2421.57,1171.33) 2430.24,1171.33 2430.24,1163.67 ccw(c2438.91,1163.67) 2447.58,1163.67 2447.58,1171.33 cw(c2456.25,1171.33) 2464.92,1171.33 2464.92,1163.67 ccw(c2473.59,1163.67) 2473.59,1155 2690.97,1155 cw(c2690.97,1125.67) 2711.71,1146.41 v1(2736.89,1121.23)
SDRAM_A10: P1.P14 U3.22 | length 1320.8
  TOP w5.78: P1.P14@1752.28,728.33 v1(1771.96,708.65) ; v1(2768.39,582.73) U3.22@2768.39,710.04
  BOTTOM w5.78: v1(1771.96,708.65) 1826.25,708.65 cw(c1826.25,695.61) 1835.47,704.83 1852.3,688 cw(c1837.81,673.51) 1858.3,673.51 1858.3,661 ccw(c1877.61,661.01) 1863.96,647.35 1864.3,647 1955.3,556 1958.98,552.31 ccw(c1986.29,579.63) 1986.3,541 2263.86,541 cw(c2263.86,508.56) 2286.8,531.5 2301.8,516.5 ccw(c2319.91,534.61) 2319.91,509 2416.05,509 ccw(c2416.05,516) 2423.05,516 cw(c2430.05,516) 2430.05,523 2433.39,523 cw(c2433.39,516) 2440.39,516 ccw(c2447.39,516) 2447.39,509 2450.73,509 ccw(c2450.73,516) 2457.73,516 cw(c2464.73,516) 2464.73,523 2468.07,523 cw(c2468.07,516) 2475.07,516 ccw(c2482.07,516) 2482.07,509 2485.41,509 ccw(c2485.41,516) 2492.41,516 cw(c2499.41,516) 2499.41,523 2502.75,523 cw(c2502.75,516) 2509.75,516 ccw(c2516.75,516) 2516.75,509 2588.57,509 ccw(c2588.57,539.73) 2610.3,518 2666.8,574.5 cw(c2686.67,554.63) 2686.67,582.73 v1(2768.39,582.73)
SDRAM_A11: P1.D11 U3.35 | length 1348.8
  TOP w5.78: P1.D11@1634.17,1122.04 v1(1653.85,1141.72) ; v1(2705.4,1121.23) U3.35@2705.4,1178.54
  BOTTOM w5.78: v1(1653.85,1141.72) 1666.71,1154.58 ccw(c1653.21,1168.08) 1672.3,1168.08 1672.3,1190 cw(c1683.3,1190) 1683.3,1201 1821.87,1201 ccw(c1821.87,1221.35) 1836.26,1206.96 1884.71,1255.41 cw(c1898.2,1241.93) 1898.2,1261 2038.69,1261 cw(c2038.69,1242.63) 2051.68,1255.62 2109.68,1197.62 ccw(c2130.49,1218.44) 2130.49,1189 2292.52,1189 cw(c2292.52,1170.22) 2305.8,1183.5 2345.52,1143.78 ccw(c2383.06,1181.32) 2383.06,1128.23 2461.64,1128.23 cw(c2461.64,1115.05) 2474.82,1115.05 2474.82,1099.67 ccw(c2483.49,1099.67) 2492.16,1099.67 2492.16,1112.56 cw(c2500.83,1112.56) 2509.5,1112.56 2509.5,1099.67 ccw(c2518.17,1099.67) 2526.84,1099.67 2526.84,1112.56 cw(c2535.51,1112.56) 2535.51,1121.23 v1(2705.4,1121.23)
SDRAM_A12: P1.B14 U3.36 | length 1317.5
  TOP w5.78: P1.B14@1752.28,1200.78 1765.92,1214.42 ccw(c1751.34,1229) 1771.96,1229 1771.96,1265.11 cw(c1790.19,1265.11) 1777.3,1278 1894.8,1395.5 cw(c1915.32,1374.98) 1915.32,1404 2557.38,1404 cw(c2557.38,1370.37) 2581.16,1394.15 2590.24,1385.07 cw(c2584.11,1378.94) 2590.24,1372.81 2588.49,1371.06 ccw(c2594.62,1364.93) 2600.76,1358.79 2616.52,1374.55 cw(c2622.66,1368.42) 2628.79,1362.28 2613.03,1346.52 ccw(c2619.16,1340.39) 2625.3,1334.25 2641.06,1350.01 cw(c2647.2,1343.88) 2653.33,1337.74 2651.58,1335.99 ccw(c2657.71,1329.86) 2651.58,1323.73 2665.43,1309.88 cw(c2645,1289.44) 2673.9,1289.44 U3.36@2673.9,1178.54
SDRAM_BA0: P1.R16 U3.20 | length 1360.1
  TOP w5.78: P1.R16@1831.02,688.96 1864.53,655.45 cw(c1858.4,649.32) 1864.53,643.19 1857.95,636.61 ccw(c1864.09,630.48) 1870.22,624.34 1878.57,632.69 cw(c1884.71,626.55) 1890.84,620.41 1882.49,612.07 ccw(c1888.63,605.93) 1894.77,599.79 1901.34,606.38 cw(c1907.47,600.25) 1913.6,606.38 1996.64,523.34 ccw(c2014.36,541.06) 2014.36,516 2694.4,516 ccw(c2694.4,527) 2705.4,527 2705.4,552.52 ccw(c2696.73,552.52) 2696.73,561.19 2693.97,561.19 cw(c2693.97,569.86) 2693.97,578.53 2713.73,578.53 ccw(c2713.73,587.2) 2713.73,595.87 2693.97,595.87 cw(c2693.97,604.54) 2693.97,613.21 2713.73,613.21 ccw(c2713.73,621.88) 2713.73,630.55 2693.97,630.55 cw(c2693.97,639.22) 2693.97,647.89 2696.73,647.89 ccw(c2696.73,656.56) 2705.4,656.56 U3.20@2705.4,710.04
SDRAM_BA1: P1.R14 U3.21 | length 1322.3
  TOP w5.78: P1.R14@1752.28,688.96 v1(1771.96,669.28) ; v1(2736.89,552.73) U3.21@2736.89,710.04
  BOTTOM w5.78: v1(1771.96,669.28) 1787.29,684.61 cw(c1800.3,671.6) 1800.3,690 1818.3,690 cw(c1818.31,673.12) 1830.25,685.05 1833.35,681.95 cw(c1821.4,670) 1838.3,670 1838.3,656.78 ccw(c1857.08,656.78) 1843.8,643.5 1956.8,530.5 ccw(c1984.56,558.26) 1984.56,519 2235.11,519 cw(c2235.11,496.81) 2250.8,512.5 2273.3,490 ccw(c2299.86,516.56) 2299.86,479 2416.39,479 ccw(c2416.39,487.5) 2424.89,487.5 cw(c2433.39,487.5) 2433.39,496 2433.73,496 cw(c2433.73,487.5) 2442.23,487.5 ccw(c2450.73,487.5) 2450.73,479 2451.07,479 ccw(c2451.07,487.5) 2459.57,487.5 cw(c2468.07,487.5) 2468.07,496 2468.41,496 cw(c2468.41,487.5) 2476.91,487.5 ccw(c2485.41,487.5) 2485.41,479 2605.4,479 ccw(c2605.4,502.9) 2622.3,486 2680.8,544.5 cw(c2700.67,524.63) 2700.67,552.73 v1(2736.89,552.73)
SDRAM_DQ0: P1.N16 U3.2 | length 805
  TOP w5.78: P1.N16@1831.02,767.7 1867.59,767.7 ccw(c1867.59,776.37) 1876.26,776.37 1876.26,803.13 cw(c1884.93,803.13) 1893.6,803.13 1893.6,772.04 ccw(c1897.94,772.04) 1897.94,767.7 1924.3,767.7 cw(c1924.3,740.4) 1943.6,759.71 1960.09,743.22 ccw(c1966.22,749.35) 1972.35,743.22 1992.08,762.96 cw(c1998.22,756.83) 2004.35,750.69 1984.62,730.95 ccw(c1990.75,724.82) 1996.89,718.68 2039.63,761.42 cw(c2046.1,754.96) 2054.3,759 cw(c2047.35,755.58) 2052.83,750.1 2009.16,706.41 ccw(c2015.29,700.28) 2009.16,694.15 2033.03,670.28 ccw(c2039.16,676.41) 2045.29,670.28 2064.68,689.66 cw(c2070.81,683.52) 2076.95,677.39 2057.56,658.01 ccw(c2063.69,651.88) 2057.56,645.75 2069.61,633.7 ccw(c2073.71,637.79) 2073.7,632 2132.69,632 ccw(c2132.69,637.78) 2138.47,637.78 U3.2@2138.47,710.04
SDRAM_DQ1: P1.N15 U3.4 | length 892.5
  TOP w5.78: P1.N15@1791.65,767.7 1805.32,754.04 ccw(c1822.31,771.02) 1822.3,747 1887.94,747 cw(c1887.94,731.64) 1898.8,742.5 1917.35,723.95 ccw(c1929.3,735.9) 1929.3,719 1935.94,719 cw(c1935.94,703.64) 1946.8,714.5 2040.3,621 ccw(c2062.03,642.73) 2062.03,612 2325.52,612 ccw(c2325.52,617.78) 2331.3,617.78 2331.3,623.56 ccw(c2325.52,623.56) 2325.52,629.34 2295,629.34 cw(c2295,638.01) 2286.33,638.01 2286.33,646.33 ccw(c2277.66,646.33) 2268.99,646.33 2268.99,638.01 cw(c2260.32,638.01) 2251.65,638.01 2251.65,646.33 ccw(c2242.98,646.33) 2234.31,646.33 2234.31,638.01 cw(c2225.64,638.01) 2225.64,629.34 2208.96,629.34 cw(c2208.96,637) 2201.3,637 2201.3,709.88 U3.4@2201.46,710.04
SDRAM_DQ2: P1.L15 U3.5 | length 821.5
  TOP w5.78: P1.L15@1791.65,846.44 1804.69,833.4 ccw(c1820.72,849.43) 1820.72,826.76 1909.73,826.76 cw(c1909.73,818.09) 1918.4,818.09 1918.4,788.67 ccw(c1927.07,788.67) 1935.74,788.67 1935.74,818.09 cw(c1944.41,818.09) 1953.08,818.09 1953.08,788.67 ccw(c1961.75,788.67) 1970.42,788.67 1970.42,818.09 cw(c1979.09,818.09) 1979.09,826.76 2011.32,826.76 cw(c2011.32,806.92) 2025.35,820.95 2065.88,780.42 ccw(c2078.97,793.52) 2078.97,775 2090.33,775 ccw(c2090.33,783.67) 2099,783.67 2099,796.33 cw(c2107.67,796.33) 2116.34,796.33 2116.34,783.67 ccw(c2125.01,783.67) 2133.68,783.67 2133.68,796.33 cw(c2142.35,796.33) 2151.02,796.33 2151.02,783.67 ccw(c2159.69,783.67) 2168.36,783.67 2168.36,796.33 cw(c2177.03,796.33) 2185.7,796.33 2185.7,783.67 ccw(c2194.37,783.67) 2194.37,775 2222.95,775 cw(c2222.95,765) 2232.95,765 U3.5@2232.95,710.04
SDRAM_DQ3: P1.L16 U3.7 | length 821.2
  TOP w5.78: P1.L16@1831.02,846.44 2071.31,846.44 cw(c2071.31,837.77) 2079.98,837.77 2079.98,835.67 ccw(c2088.65,835.67) 2097.32,835.67 2097.32,837.77 cw(c2105.99,837.77) 2114.66,837.77 2114.66,835.67 ccw(c2123.33,835.67) 2132,835.67 2132,837.77 cw(c2140.67,837.77) 2149.34,837.77 2149.34,835.67 ccw(c2158.01,835.67) 2166.68,835.67 2166.68,837.77 cw(c2175.35,837.77) 2184.02,837.77 2184.02,835.67 ccw(c2192.69,835.67) 2201.36,835.67 2201.36,837.77 cw(c2210.03,837.77) 2218.7,837.77 2218.7,835.67 ccw(c2227.37,835.67) 2236.04,835.67 2236.04,837.77 cw(c2244.71,837.77) 2253.38,837.77 2253.38,835.67 ccw(c2262.05,835.67) 2270.72,835.67 2270.72,837.77 cw(c2279.39,837.77) 2279.39,846.44 2290.17,846.44 cw(c2290.17,840.66) 2295.95,840.66 2295.95,816.18 cw(c2287.28,816.18) 2287.28,807.51 2257.97,807.51 ccw(c2257.97,798.84) 2257.97,790.17 2287.28,790.17 cw(c2287.28,781.5) 2295.95,781.5 U3.7@2295.95,710.04
SDRAM_DQ4: P1.K15 U3.8 | length 823.8
  TOP w5.78: P1.K15@1791.65,885.81 1803.88,873.58 ccw(c1821.87,891.57) 1821.87,866.13 2316.31,866.13 cw(c2316.31,855) 2327.44,855 2327.44,842.24 ccw(c2336.11,842.24) 2336.11,833.57 2358.63,833.57 cw(c2358.63,824.9) 2358.63,816.23 2336.11,816.23 ccw(c2336.11,807.56) 2336.11,798.89 2358.63,798.89 cw(c2358.63,790.22) 2358.63,781.55 2336.11,781.55 ccw(c2336.11,772.88) 2327.44,772.88 U3.8@2327.44,710.04
SDRAM_DQ5: P1.K16 U3.10 | length 849.2
  TOP w5.78: P1.K16@1831.02,885.81 2079,885.81 ccw(c2079,894.48) 2087.67,894.48 2087.67,906.33 cw(c2096.34,906.33) 2105.01,906.33 2105.01,894.48 ccw(c2113.68,894.48) 2122.35,894.48 2122.35,906.33 cw(c2131.02,906.33) 2139.69,906.33 2139.69,894.48 ccw(c2148.36,894.48) 2157.03,894.48 2157.03,906.33 cw(c2165.7,906.33) 2174.37,906.33 2174.37,894.48 ccw(c2183.04,894.48) 2183.04,885.81 2357.98,885.81 cw(c2357.98,867.68) 2370.8,880.5 2383.3,868 cw(c2366.09,850.79) 2390.43,850.79 U3.10@2390.43,710.04
SDRAM_DQ6: P1.J15 U3.11 | length 839.5
  TOP w5.78: P1.J15@1791.65,925.18 1804.06,912.77 ccw(c1821.61,930.32) 1821.61,905.5 1879.8,905.5 1887.3,913 1903.3,929 1911.99,937.69 2357.61,937.69 2366.3,929 2413.8,881.5 cw(c2394.17,861.87) 2421.93,861.87 U3.11@2421.93,710.04
SDRAM_DQ7: P1.J16 U3.13 | length 853.4
  TOP w5.78: P1.J16@1831.02,925.18 1853.37,925.18 ccw(c1853.37,939.93) 1863.8,929.5 1885.3,951 cw(c1902.2,934.1) 1902.2,958 2374.28,958 cw(c2374.28,928.98) 2394.8,949.5 2475.8,868.5 cw(c2453.78,846.48) 2484.92,846.48 U3.13@2484.92,710.04
SDRAM_DQ8: P1.C15 U3.42 | length 889.6
  TOP w5.78: P1.C15@1791.65,1161.41 1806.4,1176.16 cw(c1818.3,1164.26) 1818.3,1181.09 1834.44,1181.09 ccw(c1834.44,1197.85) 1846.29,1186 1997.89,1337.6 cw(c2027.83,1307.65) 2027.83,1350 2390.16,1350 cw(c2390.16,1315.86) 2414.3,1340 2476.3,1278 cw(c2455.49,1257.19) 2484.92,1257.19 U3.42@2484.92,1178.54
SDRAM_DQ9: P1.C16 U3.44 | length 786
  TOP w5.78: P1.C16@1831.02,1161.41 1846.3,1161.41 ccw(c1846.3,1179.3) 1858.95,1166.65 1888.8,1196.5 cw(c1902.08,1183.22) 1902.08,1202 1930.23,1202 ccw(c1930.23,1219.07) 1942.3,1207 2055.3,1320 cw(c2084.27,1291.03) 2084.27,1332 2226.94,1332 cw(c2226.94,1316.64) 2237.8,1327.5 2250.8,1314.5 ccw(c2261.66,1325.36) 2261.66,1310 2396.93,1310 cw(c2396.93,1285) 2421.93,1285 U3.44@2421.93,1178.54
SDRAM_DQ10: P1.D15 U3.45 | length 782.8
  TOP w5.78: P1.D15@1791.65,1122.04 1806.45,1136.84 cw(c1818.23,1125.06) 1818.23,1141.72 1860.26,1141.72 ccw(c1860.26,1158.04) 1871.8,1146.5 1900.8,1175.5 cw(c1914.08,1162.22) 1914.08,1181 1934.52,1181 ccw(c1934.52,1199.78) 1947.8,1186.5 2068.3,1307 cw(c2085.2,1290.1) 2085.2,1314 2206.23,1314 cw(c2206.23,1296.93) 2218.3,1309 2237.8,1289.5 ccw(c2251.08,1302.78) 2251.08,1284 2372.43,1284 cw(c2372.43,1266) 2390.43,1266 U3.45@2390.43,1178.54
SDRAM_DQ11: P1.D16 U3.47 | length 793.2
  TOP w5.78: P1.D16@1831.02,1122.04 1871.91,1122.04 ccw(c1871.91,1142.39) 1886.3,1128 1914.8,1156.5 cw(c1925.66,1145.64) 1925.66,1161 1940.81,1161 ccw(c1940.81,1191.14) 1962.13,1169.83 1978.48,1186.18 cw(c1981.22,1183.43) 1983.96,1186.18 ccw(c1986.72,1188.91) 1989.46,1186.16 1996.25,1192.95 ccw(c1993.5,1195.69) 1996.25,1198.43 1990.73,1203.95 cw(c1993.48,1206.69) 1990.73,1209.43 1997.52,1216.22 cw(c2000.26,1213.47) 2003,1216.22 2008.52,1210.7 ccw(c2011.26,1213.45) 2014,1210.7 2020.79,1217.49 ccw(c2018.04,1220.23) 2020.79,1222.97 2015.27,1228.49 cw(c2018.02,1231.23) 2015.27,1233.97 2022.06,1240.76 cw(c2024.8,1238.01) 2027.54,1240.76 2033.06,1235.24 ccw(c2035.8,1237.99) 2038.54,1235.24 2045.33,1242.03 ccw(c2042.58,1244.77) 2045.33,1247.51 cw(c2048.06,1250.27) 2045.31,1253.01 2082.63,1290.33 cw(c2093.91,1279.04) 2093.91,1295 2185.94,1295 cw(c2185.94,1279.64) 2196.8,1290.5 2203.49,1283.81 cw(c2199.68,1280) 2203.49,1276.19 2197.61,1270.31 ccw(c2203.38,1264.54) 2209.15,1258.77 2215.03,1264.65 cw(c2218.84,1260.84) 2222.65,1264.65 2225.8,1261.5 ccw(c2231.84,1267.54) 2231.84,1259 2281.91,1259 cw(c2281.91,1253.61) 2287.3,1253.61 2287.3,1237.39 ; 2287.29,1237.39 ccw(c2295.39,1237.39) 2303.49,1237.39 2303.49,1253.61 cw(c2308.88,1253.61) 2308.88,1259 2319.66,1259 cw(c2319.66,1251.22) 2327.44,1251.22 U3.47@2327.44,1178.54
SDRAM_DQ12: P1.F16 U3.48 | length 789.8
  TOP w5.78: P1.F16@1831.02,1043.3 2299.54,1043.3 ccw(c2299.54,1050.71) 2306.95,1050.71 2306.95,1059.86 ccw(c2298.28,1059.86) 2298.28,1068.53 2259.97,1068.53 cw(c2259.97,1077.2) 2259.97,1085.87 2298.28,1085.87 ccw(c2298.28,1094.54) 2298.28,1103.21 2259.97,1103.21 cw(c2259.97,1111.88) 2259.97,1120.55 2287.28,1120.55 ccw(c2287.28,1129.22) 2295.95,1129.22 U3.48@2295.95,1178.54
SDRAM_DQ13: P1.F15 U3.50 | length 806.3
  TOP w5.78: P1.F15@1791.65,1043.3 1804.32,1055.97 cw(c1821.24,1039.05) 1821.24,1062.98 2040.85,1062.98 ccw(c2040.85,1071.65) 2049.52,1071.65 2049.52,1086.33 cw(c2058.19,1086.33) 2066.86,1086.33 2066.86,1071.65 ccw(c2075.53,1071.65) 2084.2,1071.65 2084.2,1086.33 cw(c2092.87,1086.33) 2101.54,1086.33 2101.54,1071.65 ccw(c2110.21,1071.65) 2118.88,1071.65 2118.88,1086.33 cw(c2127.55,1086.33) 2136.22,1086.33 2136.22,1071.65 ccw(c2144.89,1071.65) 2153.56,1071.65 2153.56,1086.33 cw(c2162.23,1086.33) 2170.9,1086.33 2170.9,1071.65 ccw(c2179.57,1071.65) 2188.24,1071.65 2188.24,1086.33 cw(c2196.91,1086.33) 2205.58,1086.33 2205.58,1071.65 ccw(c2214.25,1071.65) 2214.25,1062.98 2224.99,1062.98 ccw(c2224.99,1070.94) 2232.95,1070.94 U3.50@2232.95,1178.54